# Altium PCB Tailgate PCB.PcbDoc
Units mil, origin at the board's own origin, x right, y up, seen from the top; angles counter-clockwise.
Board outline 1187.47 x 684.65 mil, 4 copper layers (Top Layer, Ground, Power, Bottom Layer), stack 29.8 mil thick; 20 components, 15 nets, 55 pads, 68 vias.
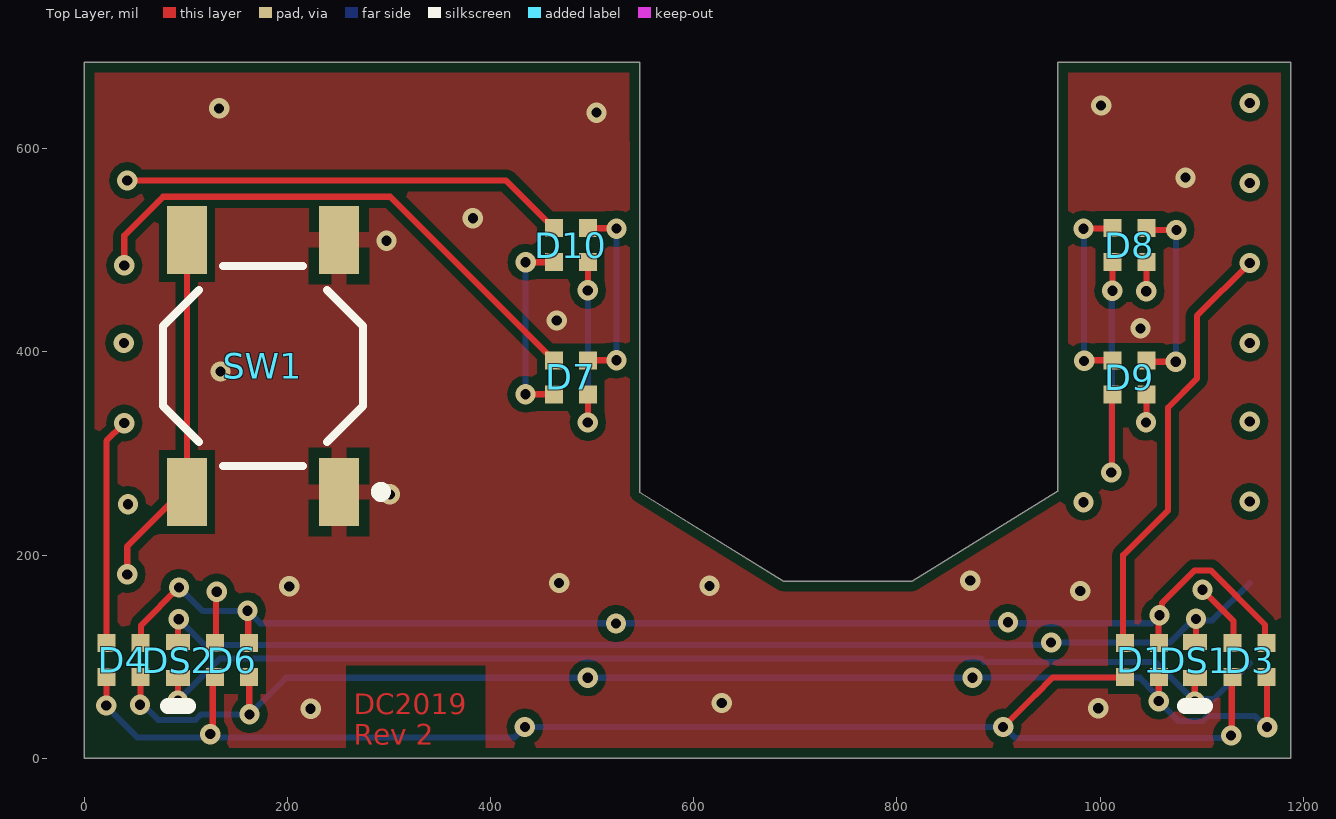
[diagram p0: Top Layer view]
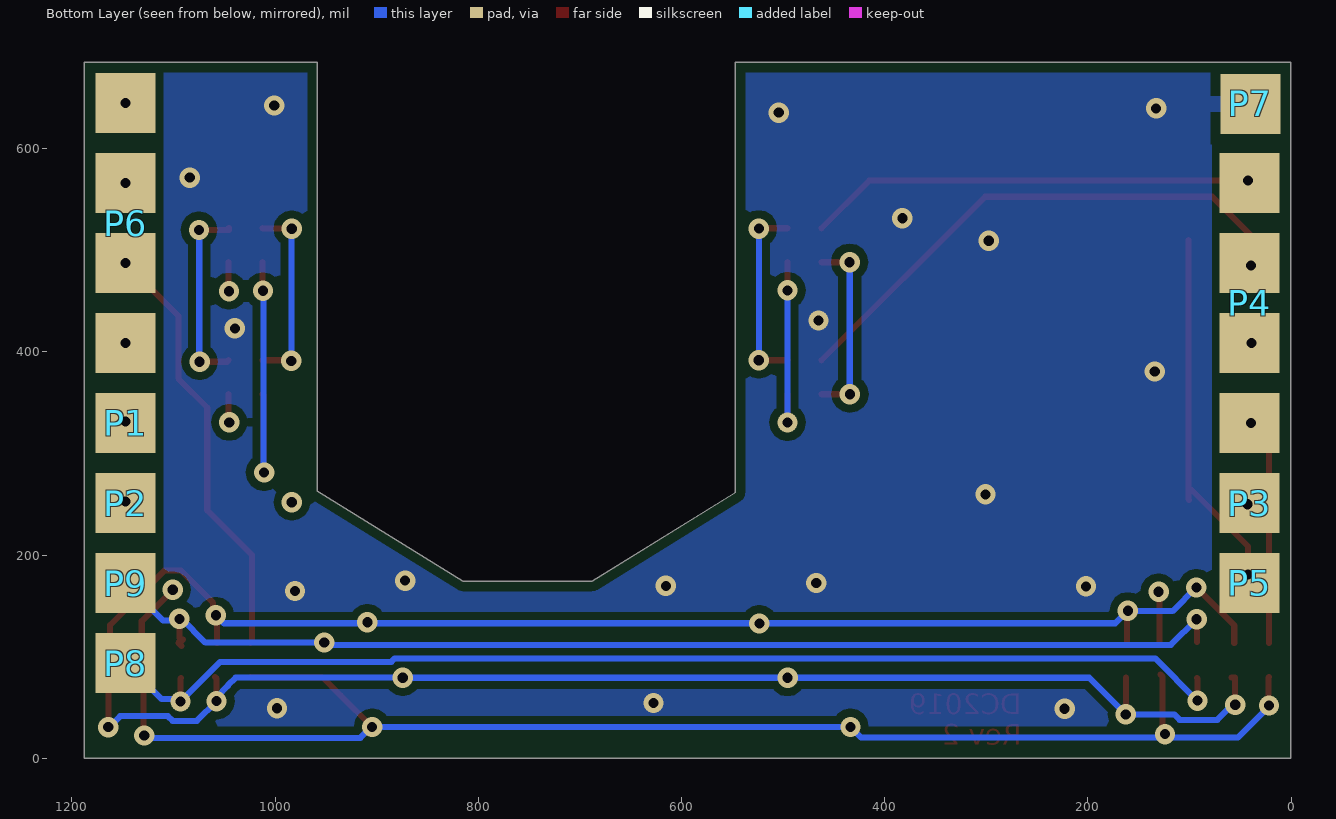
[diagram p1: Bottom Layer view, seen from below]
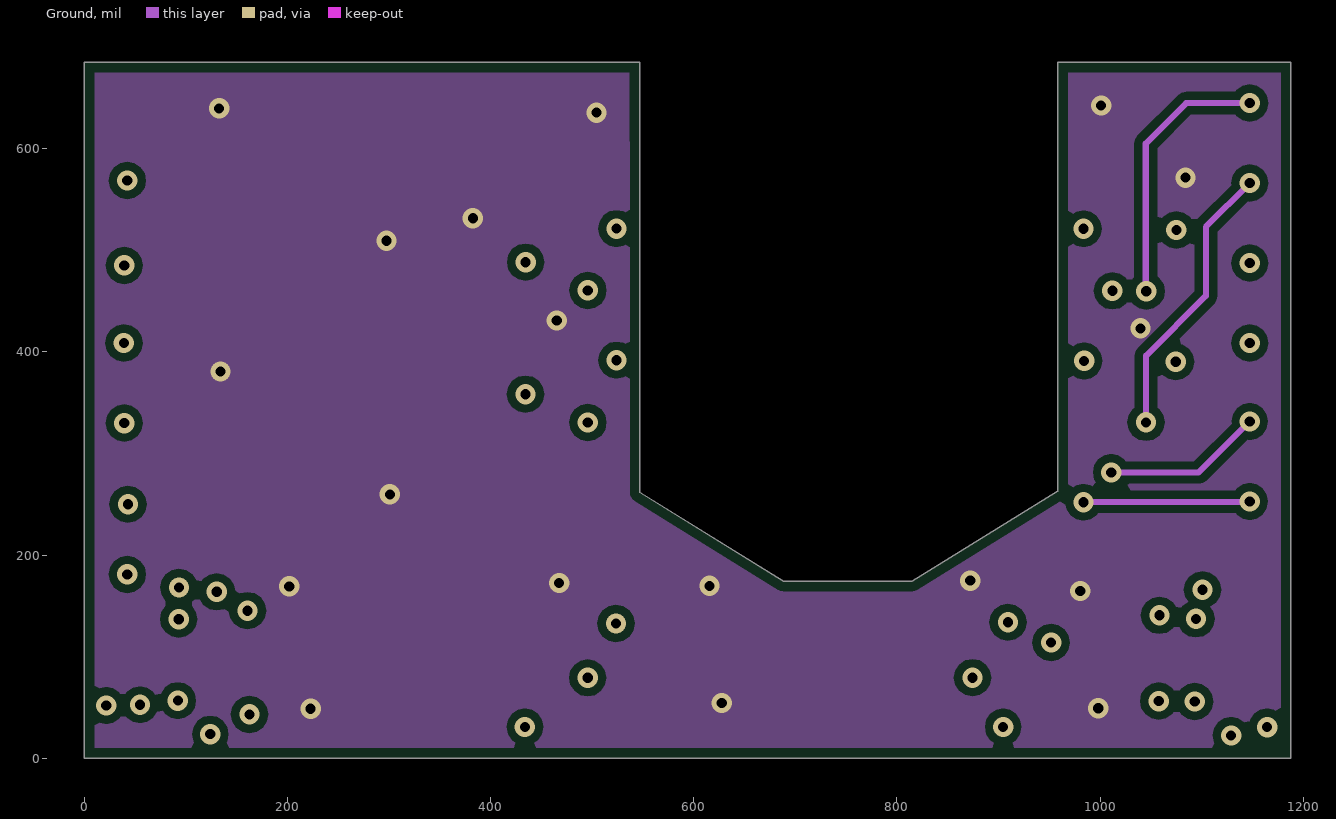
[diagram p2: Ground]
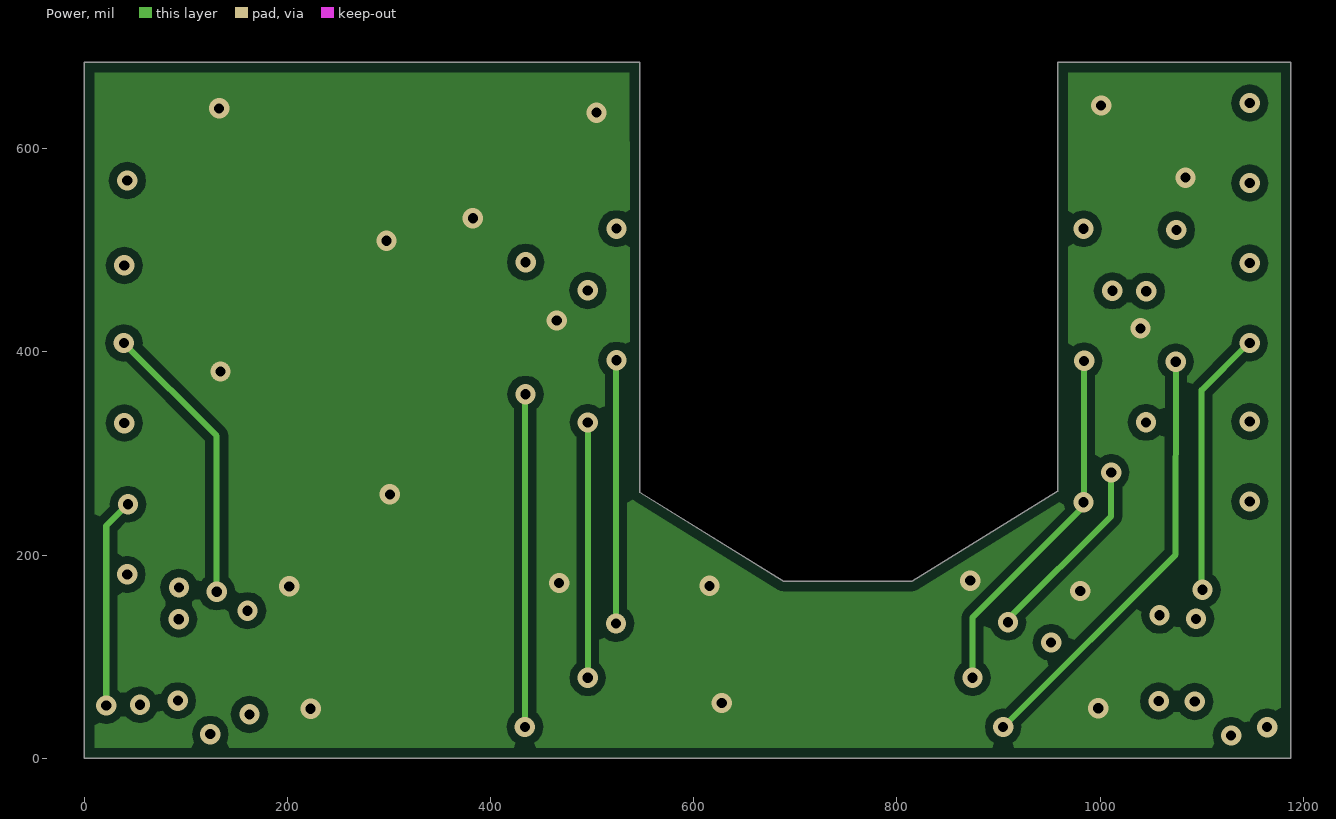
[diagram p3: Power]
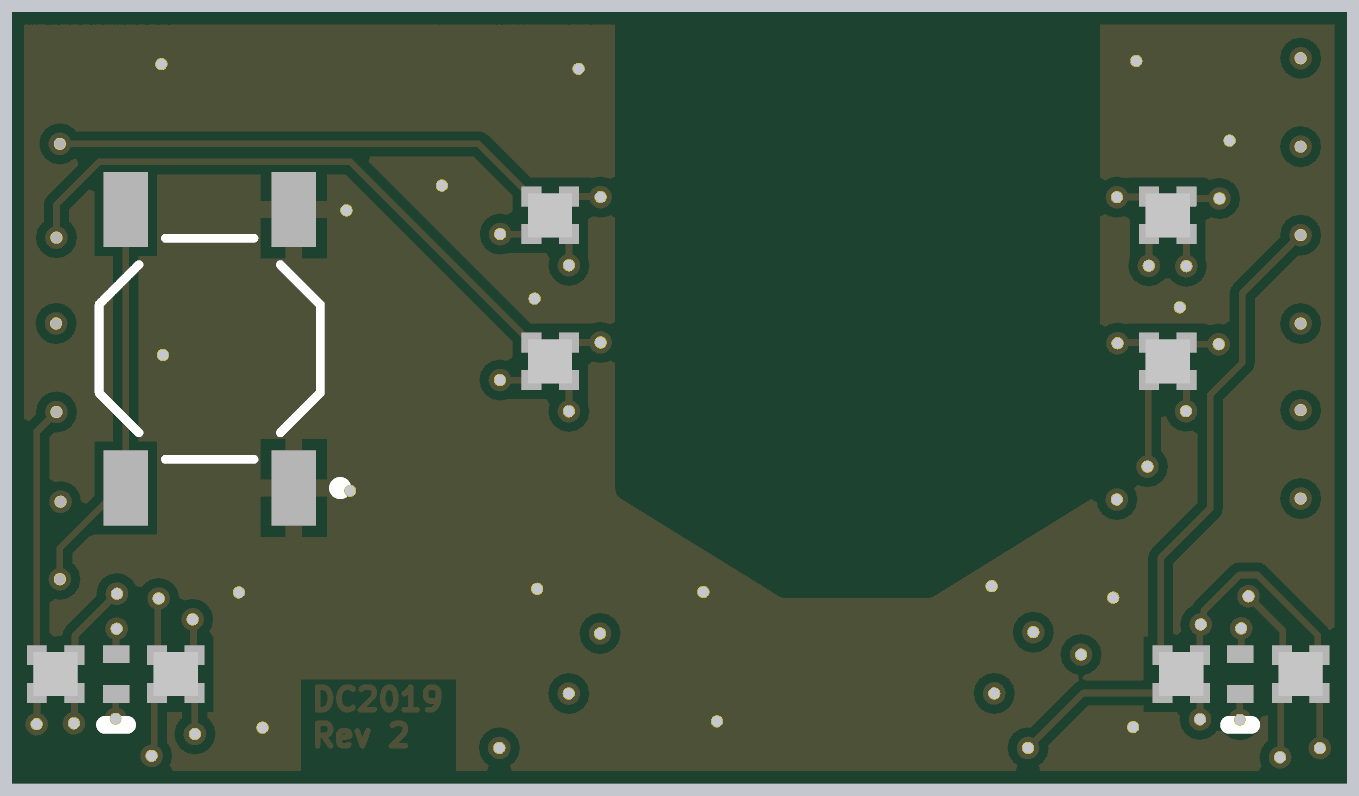
[diagram p4: 3D render of the assembled board from above, using the file's embedded part models]

## Layer stack, top to bottom
Top Solder: solder mask 0.4, Solder Resist, Dk 3.5
Top Layer: signal copper 1.4
Dielectric 2: prepreg 5.6, PP-006, Dk 4.1
Ground: signal copper 1.4
Dielectric 1: dielectric 13, FR-4, Dk 4.8
Power: signal copper 1.4
Dielectric 3: prepreg 5.6, PP-006, Dk 4.1
Bottom Layer: signal copper 1.4
Bottom Solder: solder mask 0.4, Solder Resist, Dk 3.5

## Board outline
546.92,261.83 ccw(c547.18,261.83) 547.04,261.6 688.34,174.34 ccw(c688.47,174.56) 688.47,174.3 814.9,174.3 ccw(c814.9,174.56) 815.04,174.34 958.22,262.77 ccw(c958.08,263) 958.34,263 958.34,684.91 1187.73,684.91 1187.73,0.27 0.27,0.27 0.27,684.91 546.92,684.91

## Design rules (kind name [scope] priority, off if disabled: settings)
BoardOutlineClearance [All] p1: gap=10 ignorepadtopadclearanceinfootprint=FALSE
Clearance [All] p1: gap=6 ignorepadtopadclearanceinfootprint=FALSE except(0: Arc-Hole Track-Hole SMDPad-Hole THPad-Hole Via-Hole Fill-Hole Poly-Hole Region-Hole Text-Hole; 8: Arc-Poly Track-Poly SMDPad-Poly THPad-Poly Via-Poly Fill-Poly Poly-Poly Poly-Text)
DiffPairsRouting [All] p1: maxlimit=10 minlimit=6 mostfreqgap=6 toplayer_minwidth=6 toplayer_maxwidth=15 toplayer_prefwidth=8 midlayer1_minwidth=6 midlayer1_maxwidth=15 midlayer1_prefwidth=8 midlayer2_minwidth=6 midlayer2_maxwidth=15 midlayer2_prefwidth=8 bottomlayer_minwidth=6 bottomlayer_maxwidth=15 bottomlayer_prefwidth=8 maxuncoupledlength=500
HoleSize [All] p1: absolutevalues=TRUE maxlimit=150 minlimit=10 maxpercent=80.000 minpercent=20.000
HoleToHoleClearance [All] p1: gap=18 allowstackedmicrovias=TRUE
MinimumAnnularRing [All] p1: minimumring=5
MinimumSolderMaskSliver [All] p1: minsoldermaskwidth=6
PlaneClearance [All] p1: clearance=12
PlaneConnect PlaneConnect_IsVia [IsVia] p1: planeconnectstyle=Direct reliefexpansion=20 reliefentries=4 reliefconductorwidth=10 reliefairgap=10
PlaneConnect [All] p2: planeconnectstyle=Relief reliefexpansion=20 reliefentries=4 reliefconductorwidth=15 reliefairgap=12
PolygonConnect PolygonConnect_IsVia [IsVia] p1: connectstyle=Direct reliefconductorwidth=10 reliefentries=4 polygonreliefangle="45 Angle" airgapwidth=10
PolygonConnect [All] p2: connectstyle=Relief reliefconductorwidth=15 reliefentries=4 polygonreliefangle="90 Angle" airgapwidth=10
RoutingVias [All] p1: holewidth=10 width=20 viastyle="Through Hole" minholewidth=10 minwidth=20 maxholewidth=28 maxwidth=50
SilkToSilkClearance [All] p1: silktosilkclearance=6
SilkToSolderMaskClearance [IsPad] p1: minsilkscreentomaskgap=6 clearancetoexposedcopper=TRUE
SolderMaskExpansion [Not IsVia] p1: expansion=4
Width [All] p1: maxlimit=50 minlimit=6 preferedwidth=6
22 further rules are at their usual default settings.

## Components (designator, comment, footprint, x,y, rotation, side; value= is the part's Value field where it differs from the comment)
D1 "0402 RGB LED" "0404 RGB LED" 1041.02,96.6 r0 top
D3 "0402 RGB LED" "0404 RGB LED" 1147.23,96.6 r0 top
D4 "0402 RGB LED" "0404 RGB LED" 38.67,96.6 r0 top
D6 "0402 RGB LED" "0404 RGB LED" 145.67,96.6 r0 top
D7 "0402 RGB LED" "0404 RGB LED" 478.99,374.99 r0 top
D8 "0402 RGB LED" "0404 RGB LED" 1028.99,504.99 r180 top
D9 "0402 RGB LED" "0404 RGB LED" 1028.99,374.99 r180 top
D10 "0402 RGB LED" "0404 RGB LED" 478.99,504.99 r0 top
DS1 "White LED" EVRL-0402-2_V 1093.39,96.61 r270 top
DS2 "White LED" EVRL-0402-2_V 92.52,96.61 r270 top
P1 "1p SMD Pads" "1p SMD pad"#1 1147.23,331.57 r180 bottom
P2 "1p SMD Pads" "1p SMD pad"#1 1147.23,252.83 r180 bottom
P3 "1p SMD Pads" "1p SMD pad"#2 40.77,329.92 r180 bottom
P4 "4p SMD Pads" "4p SMD pad"#1 40.77,644.9 r0 bottom
P5 "1p SMD Pads" "1p SMD pad"#3 40.77,172.44 r0 top
P6 "4p SMD Pads" "4p SMD pad"#2 1147.23,644.9 r0 bottom
P7 "1p SMD Pads" "1p SMD pad"#4 40.79,644.88 r0 top
P8 "1p SMD Pads" "1p SMD pad"#5 1881.59,110.78 r0 top
P9 "1p SMD Pads" "1p SMD pad"#6 1144.62,177.07 r0 top
SW1 "TL3342F160QG" ESWI-TL3342F160QG_V 175.92,386.23 r180 top

## Footprints (in the part's own frame and the unit in brackets; to place one, negate y for a bottom-side part, rotate by r counter-clockwise, add the part's x,y. Pads: shape width x height; smd on the part's side, far side on the other; paste and mask are expansions set on the pad)
"1p SMD pad"#1 [mm]
  rect 1.5x1.5 smd: 1(0,-0.042)
"1p SMD pad"#2 [mm]
  rect 1.5x1.5 smd: 1(0,-2)
"1p SMD pad"#3 [mm]
  rect 1.5x1.5 smd far side: 1(0,0)
"1p SMD pad"#4 [mm]
  rect 1.5x1.5 smd far side: 1(-0.014,-0.022)
"1p SMD pad"#5 [mm]
  rect 1.5x1.5 smd far side: 1(-18.652,-0.434)
"1p SMD pad"#6 [mm]
  rect 1.5x1.5 smd far side: 1(0.067,-0.118)
"4p SMD pad"#1 [mm]
  rect 1.5x1.5 smd: 1(0,2) 2(0,4) 3(0,6) 4(0,8)
"4p SMD pad"#2 [mm]
  rect 1.5x1.5 smd: 1(0,0) 2(0,2) 3(0,4) 4(0,6)
"0404 RGB LED" [mm] "0404 RGB LED"
  rect 0.45x0.45 smd: 1(-0.425,0.425) 2(0.425,0.425) 3(0.425,-0.425) 4(-0.425,-0.425)
  body extent -0.5,-0.5 0.5,0.5, height 0.52
ESWI-TL3342F160QG_V [mm] "SMD, 4-Leads, Body 5x5mm, Pitch 6.3mm"
  rect 1x1.7 smd: 1(-1.9,3.15) 2(-1.9,-3.15) 3(1.9,3.15) 4(1.9,-3.15)
  silkscreen extent -3.07,-2.5 2.5,3.27, body extent -2.5,-2.5 2.5,2.5, height 1.5
EVRL-0402-2_V [mm] "SMD, 2-Leads, Body 1x0.5mm"
  rect 0.4x0.6 smd: 1(-0.45,0) 2(0.45,0)
  silkscreen extent 1.15,-0.25 1.15,0.25, body extent -0.5,-0.25 0.5,0.25, height 0.25

## Part data
DS1 DS2: library part CMP-2100-03575-1, "Chip LED, White, 5 V, 10 mA, 30 mW, -40 to 85 degC, 2-Pin SMD (0402), RoHS, Tape and Reel", Case/Package=0402, Forward Current=5mA, Forward Voltage=2.6V, Illumination Colour=White, Lens Colour=Yellow, Manufacturer="Everlight Electronics", Max Operating Temperature=85degC, Min Operating Temperature=-40degC, Package Description="2-Pin Surface Mount Device, Body 1 x 0.5 mm", Package Quantity=3000, Power Rating=30mW, Datasheet URL=http://www.everlight.com/file/ProductFile/16-219A-T2D-AR2T1QY-3T.pdf, Datasheet Version="Rev. 5, 04/2013", Luminous Intensity=360mcd, Manufacturer URL=http://www.everlight.com/, Mount=Standard, Package Reference=0402, Packaging=TapeandReel, RoHSCompliant=true, Viewing Angle=130degrees
P1 P2 P3 P5 P7 P8 P9: library part "1p SMD"
P4 P6: library part "4p SMD"
SW1: library part CMP-1696-00003-1, "Switch, Tactile, SPST-NO, 50 mA, 12 V, 4-Pin SMD, RoHS, Tape and Reel", Capacitance="4.7 uF", Case\Package=Radial, Max Operating Temperature="85 degC", Min Operating Temperature="-40 degC", Package Quantity=200, Tolerance=20%, Voltage Rating="50 V", ComponentLink1Description="Manufacturer URL", ComponentLink1URL=http://www.e-switch.ch/en/, ComponentLink2Description=Datasheet, ComponentLink2URL=http://spec_sheets.e-switch.com/specs/P010632.pdf, DatasheetVersion="Rev. I, 12/2010", Diameter="5 mm", Height="11 mm", Lead Pitch="2 mm", Length="11 mm", Mount="Through Hole", PackageDescription="4-Pin Surface Mount Device, Body 5 x 5 mm, Pitch 6.3 mm", PackageReference=TL3342F160QG, Packaging=Bulk, Pins=2, Radiation Hardening=No, REACH SVHC="No SVHC", RoHSCompliant=true, Voltage Rating (DC)="50 V", Width="0 inch"

## Via types
v1: diameter 20, hole 10, Top Layer to Bottom Layer, tented both sides, 56 vias
v2: diameter 20, hole 10, Top Layer to Bottom Layer, tented top, 12 vias

## Nets (pads, with @x,y where several pads share a name; then routed paths per layer and width w, separated by ;. In a path a pad name is that pad's centre, name@x,y a point inside that pad or via, vN(x,y) a via of type N, cw(c..) or ccw(c..) an arc to the next point about the centre after c; other vN are vias at no path point)
3v3: DS1.2 DS2.2 P8.1 | length 1148.9
  Top Layer w6: v1(92.21,56.73) 92.21,78.59 DS2.2 ; DS1.2@1092.82,78.97 1093.11,78.68 v1(1093.11,55.82)
  Bottom Layer w6: v1(92.21,56.73) 133.8,98.32 882.3,98.32 885.7,94.91 1054.02,94.91 1090.43,58.5 1112.05,58.5 P8.1
BLUE5: D1.4 D3.4 D4.4 D6.4 D7.4 D8.4 D9.4 D10.4 P3.1 | length 2748.2
  Top Layer w6: D4.4 22.18,79.61 22.18,62.01 ; v1(124.18,23.75) 126.56,26.13 126.56,80.38 D6.4@128.45,82.28 ; v1(434.33,358.38) 437.75,358.38 437.87,358.26 D7.4 ; v1(434.56,488.29) 438.32,488.29 438.36,488.26 D10.4 ; v1(904.53,30.8) 935.89,62.17 953.39,79.64 1024.07,79.64 D1.4 ; D9.4 1047.16,390.28 v1(1074.34,390.28) ; D8.4 1045.49,521.96 1045.49,520.01 v1(1075,520.01) ; v1(1128.91,22.44) 1129.57,23.1 D3.4@1129.57,79.36
  Power w6: v1@21.79,54.53 21.79,228.74 v2(43.09,250.04) ; v1(433.79,30.8) 434.06,31.07 434.06,358.11 v1(434.33,358.38) ; v1(904.53,30.8) 1074.24,200.52 1074.24,206.93 1074.74,389.88 v1(1074.34,390.28)
  Bottom Layer w6: v1(21.79,51.97) 22.03,51.73 22.03,50.88 52.57,20.34 423.32,20.34 v1(433.79,30.8) v1(904.53,30.8) 905.35,30.8 916.02,20.13 1125.95,20.13 1125.95,24.82 v1@1127.84,26.72 ; v1(434.33,358.38) 434.44,358.49 434.44,488.18 v1(434.56,488.29) ; v1(1074.34,390.28) 1074.67,390.61 1074.67,519.69 v1(1075,520.01)
COL1: D10.1 P4.1 | length 439.2
  Top Layer w6: v2(42.48,568.65) 415.33,568.65 D10.1
COL2: D7.1 P4.2 | length 534.6
  Top Layer w6: v2(39.45,485.15) 39.45,514.46 72.43,547.43 77.71,552.71 301.27,552.71 D7.1
COL3: D6.1 P4.3 | length 334.1
  Top Layer w6: D6.1 129.69,114.09 129.69,162.84 v1@130.82,163.97
  Power w6: v2(39.12,408.71) 130.45,317.39 v1(130.45,163.87)
COL4: D4.1 P4.4 | length 224.7
  Top Layer w6: D4.1 21.93,133.62 ; 21.97,133.66 21.97,312.42 38.03,328.49 v2@40.94,328.49
  other v2: 39.46,329.91
COL5: D8.1 P6.1 | length 293.1
  Top Layer w6: v1(1045.43,459.72) 1045.43,463.64 1045.72,463.93 D8.1
  Ground w6: v1(1045.43,459.72) 1044.85,460.31 1044.85,605.06 1084.69,644.9 v2(1147.23,644.9)
COL6: D9.1 P6.2 | length 305.6
  Top Layer w6: v1(1045.2,330.65) 1045.2,333.42 1045.72,333.94 D9.1
  Ground w6: v1(1045.2,330.65) 1045.2,396.22 1104.14,455.16 1104.14,523.07 v2(1147.23,566.16)
COL7: D1.1 P6.3 | length 426.4
  Top Layer w6: D1.1 1022.61,115.02 1022.61,199.85 1066.82,244.06 1066.82,345.24 1095.2,373.62 1095.2,435.39 v2(1147.23,487.42)
COL8: D3.1 P6.4 | length 328.9
  Top Layer w6: v1(1100.81,165.88) 1100.81,165.45 1131.32,134.94 D3.1@1131.32,114.12
  Power w6: v1@1099.84,163.53 1099.84,362.32 1144.56,407.04 v2@1144.56,409.47
  other v2: 1147.23,408.68
GND: P7.1 SW1.1 SW1.2
  other v1: 222.95,48.83 998.12,49.29 627.57,54.44 980.39,164.57 201.95,169.24 615.44,169.71 467.49,172.5 872.11,174.83 300.88,259.78 134.28,380.65 1039.65,423.11 465.23,430.81 297.62,509.46 382.63,531.52 1083.99,571.52 504.36,635.46 132.88,639.67 1000.93,642.47
GREEN5: D1.3 D3.3 D4.3 D6.3 D7.3 D8.3 D9.3 D10.3 P2.1 | length 2447.6
  Top Layer w6: v1(55.03,52.71) 55.45,53.13 55.45,79.33 58.67,79.33 D4.3@58.43,79.57 ; D6.3@162.53,79.64 162.53,43.44 v1(162.73,43.23) ; v1(495.75,330.53) D7.3 ; v1@495.72,466.74 D10.3 ; v1(495.75,460.55) v1@495.74,466.72 ; v1(983.7,521.18) 983.97,521.45 1011.99,521.45 D8.3 ; v1(984.2,391.17) 984.75,391.72 D9.3 ; v1(1057.64,56.27) 1057.7,56.32 1057.7,78.58 D1.3@1059.13,80.01 ; D3.3 1164.15,79.68 1164.15,30.89 v1(1164.33,30.7)
  Ground w6: v1(983.59,252) 984,252.41 1146.82,252.41 v2(1147.23,252.83)
  Power w6: v1(495.62,79.23) 495.75,79.36 v1(495.75,330.53) ; v1(874.43,79.32) 874.43,138.65 984.2,248.43 v1(984.2,391.17)
  Bottom Layer w6: v1(55.03,52.71) 57.77,52.71 72.75,37.73 109.61,37.73 115.11,43.23 v1(162.73,43.23) 198.73,79.23 v1(495.62,79.23) ; v1@494.06,79.27 874.38,79.27 v1(874.43,79.32) ; v1(495.75,330.53) v1(495.75,460.55) ; v1@873.66,79.39 1038.98,79.39 1046.48,71.89 1046.48,71.22 1057.64,60.06 v1(1057.64,56.27) 1077.09,36.82 1100.98,36.82 1105.6,41.44 1152.49,41.44 1163.23,30.7 v1(1164.33,30.7) ; v1(983.7,521.18) 983.95,520.93 983.95,391.42 v1(984.2,391.17)
RED5: D1.2 D3.2 D4.2 D6.2 D7.2 D8.2 D9.2 D10.2 P1.1 | length 2360
  Top Layer w6: D4.2@56,113.59 56,130.87 v1(93.3,168.16) ; v1(160.72,145.28) 161.56,144.44 161.56,113.86 D6.2@160.89,113.19 ; D7.2 523.84,391.72 v1(523.94,391.83) ; D10.2 517.48,521.72 517.92,521.28 v1(523.93,521.28) ; v1(1010.85,281.32) 1011.56,282.02 1011.56,357.56 D9.2 ; v1(1012.04,460.14) 1012.22,460.32 1012.22,465.77 1012.26,465.81 D8.2 ; D1.2 1057.43,113.65 1057.43,143.89 1057.72,143.89 1061.03,147.2 1061.03,152.97 1092.94,184.88 1108.68,184.88 1162.37,131.19 1162.37,114.92 D3.2
  Ground w6: v1(1010.85,281.32) 1096.98,281.32 v2(1147.23,331.57)
  Power w6: v1(523.45,132.69) 523.45,391.34 v1(523.94,391.83) ; v1(909.24,133.87) 909.24,136.64 1010.85,238.25 v1(1010.85,281.32)
  Bottom Layer w6: v1(93.3,168.16) 116.59,144.87 160.31,144.87 v1(160.72,145.28) 173.11,132.9 v1@517.81,132.9 ; v1@517.83,132.91 909.24,132.91 1050.54,132.91 v1(1058.36,140.73) ; v1(523.94,391.83) v1(523.93,521.28) ; v1(1010.85,281.32) 1011.44,281.91 1011.44,459.55 v1(1012.04,460.14)
REV_LIGHT: DS1.1 DS2.1 P9.1 | length 1153
  Top Layer w6: DS2.1 92.52,135.31 93.06,135.85 v1(93.06,136.91) ; v1(951.73,113.91) v1@951.94,114.12 ; DS1.1@1090.93,116.79 DS1.1 ; DS1.1@1092.13,110.4 1095.28,113.56 1092.33,116.51 1094.3,118.48 v1(1094.3,137.25)
  Bottom Layer w6: v1(93.06,136.91) 118.29,111.69 949.5,111.69 v1(951.73,113.91) ; v1@951.15,113.91 v1(951.73,113.91) ; v1@1090.93,135.71 1110.52,135.71 P9.1 ; v1@1092.51,141.19 1092.51,137.83 1068.6,113.91 v1(951.73,113.91)
SW1: P5.1 SW1.3 SW1.4 | length 366.8
  Top Layer w6: v2(42.47,181.03) 42.47,208.64 98.58,264.75 SW1.3 ; SW1.3@100.52,254.28 101.12,254.88 SW1.3 ; SW1.4 SW1.3

## Polygon pours and split planes (outlines as drawn)
GND on Bottom Layer "Bottom Layer-GND" (solid, remove dead copper, pour order 0): -31.24,-0.24 -31.24,728.2 1213.86,728.2 1213.85,-0.25
GND on Ground "Ground-GND" (solid, remove dead copper, pour order 4): -31.24,-0.24 -31.24,728.2 1213.86,728.2 1213.85,-0.25
GND on Power "Power-GND" (solid, remove dead copper, pour order 6): -31.24,-0.24 -31.24,728.2 1213.86,728.2 1213.85,-0.25
GND on Top Layer "Top Layer-GND" (solid, remove dead copper, pour order 2): -31.24,-0.24 -31.24,728.2 1213.86,728.2 1213.85,-0.25

## Other copper
Top Layer:
  text "DC2019 / Rev 2" at 265.25,13.23 h20

## Silkscreen, mask and mechanical layers (free items; w line width, h text height)
Mechanical 1:
  lines w0.5: 143.63,685.18 442.52,685.18 547.18,685.18 547.18,261.83 688.47,174.56 814.9,174.56 958.08,263 958.08,685.18 1188,685.18 1188,395.52 1188,220.52 1188,0 0,0 0,220.52 0,395.52 0,685.18 174.63,685.18